# Altium PCB WifiCarPcbDoc.PcbDoc
Units mil, origin at the board's own origin, x right, y up, seen from the top; angles counter-clockwise.
Board outline 3635 x 1570 mil, 2 copper layers (Top Layer, Bottom Layer); 15 components, 34 nets, 94 pads, 0 vias.
Unrouted connection lines stored in the file: 1.
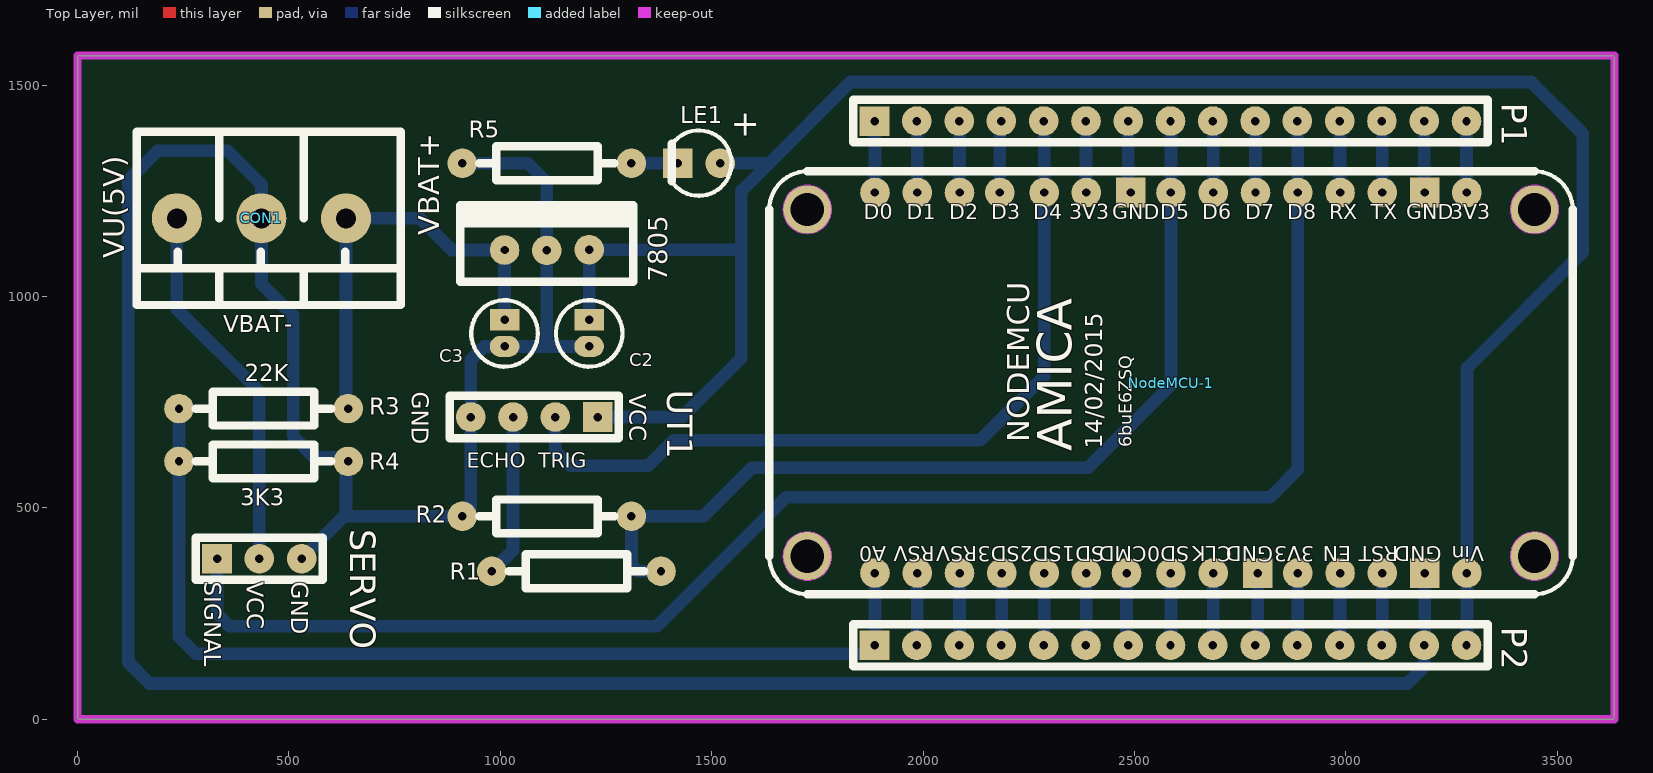
[diagram p0: Top Layer view]
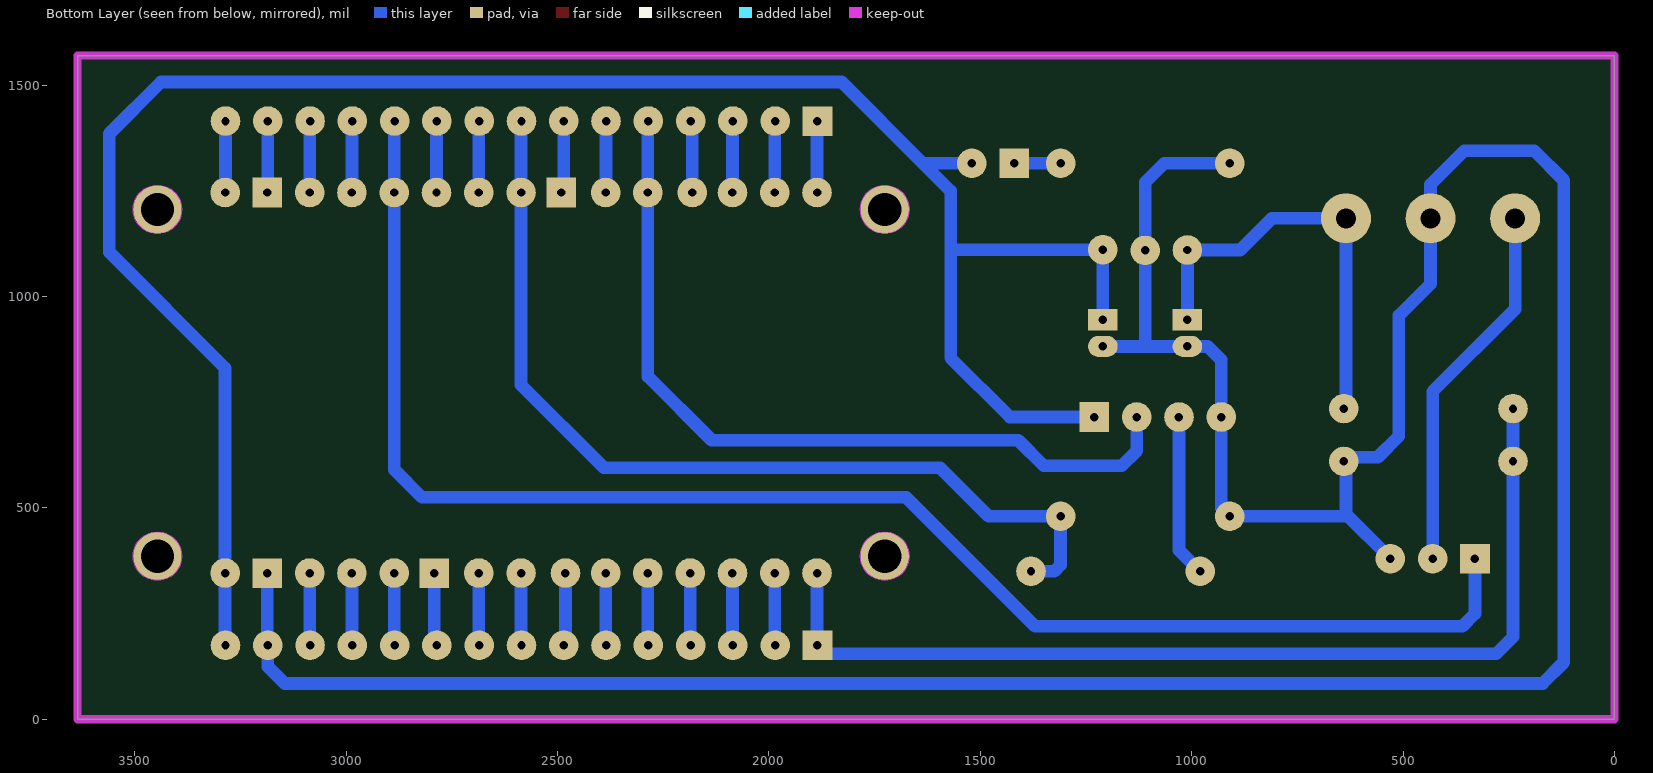
[diagram p1: Bottom Layer view, seen from below]

## Layer stack, top to bottom
Top Solder: solder mask 0.4, Solder Resist, Dk 3.5
Top Layer: signal copper 1.4
Dielectric 1: dielectric 12.6, FR-4, Dk 4.8
Bottom Layer: signal copper 1.4
Bottom Solder: solder mask 0.4, Solder Resist, Dk 3.5

## Board outline
0,0 3635,0 3635,1570 0,1570

## Design rules (kind name [scope] priority, off if disabled: settings)
Clearance [All] p1: gap=10
PolygonConnect [All] p1: connectstyle=Relief reliefconductorwidth=10 reliefentries=4 polygonreliefangle="90 Angle" airgapwidth=10
RoutingVias [All] p1: holewidth=28 width=50 viastyle="Through Hole" minholewidth=28 minwidth=50 maxholewidth=28 maxwidth=50
SolderMaskExpansion [All] p1: expansion=4
Width [All] p1: maxlimit=50 minlimit=10 preferedwidth=30 toplayer_maxwidth=10 toplayer_prefwidth=10 bottomlayer_minwidth=20 minimp=50.000000 maximp=50.000000 favimp=50.000000
30 further rules are at their usual default settings.

## Components (designator, comment, footprint, x,y, rotation, side; value= is the part's Value field where it differs from the comment)
7805 "LM7805" TO-220 1010,1110 r0 top (schematic designator REG1)
C2 "Capacitor Eletrolitico" "CAPACITOR ELETROLITICO 4x5x1.6mm" 1210,945 r90 top
C3 "Capacitor Eletrolitico" "CAPACITOR ELETROLITICO 4x5x1.6mm" 1010,945 r90 top
CON1 "KRE3vias" KRE3-3vias 435,1185 r0 top
LE1 "LED PTH" "LED PTH 3mm VERDE" 1470,1315 r180 top
NodeMCU-1 "NodeMCU V1.0 ESP-12E" "NodeMCU V1.0 ESP-12E" 1640,295 r90 top
P1 "Header 15" HDR1X15 1885,1415 r0 top
P2 "Header 15" HDR1X15 1885,175 r0 top
R1 "Res2" AXIAL-0.4#1 1180,350 r180 top
R2 "Res2" AXIAL-0.4#1 1110,480 r0 top
R3 "22K" AXIAL-0.4#1 440,735 r180 top
R4 "3K3" AXIAL-0.4#2 440,610 r0 top
R5 "Res2" AXIAL-0.4#1 1110,1315 r0 top
SERVO "Micro 9g" SERVO 380,275 r0 top
UT1 "Ultrasonic Sensor" HC-SR04 1055,660 r0 top

## Footprints (in the part's own frame and the unit in brackets; to place one, negate y for a bottom-side part, rotate by r counter-clockwise, add the part's x,y. Pads: shape width x height; smd on the part's side, far side on the other; paste and mask are expansions set on the pad)
AXIAL-0.4#1 [mil] "Axial Device, Thru-Hole; 2 Leads; 0.4 in Pin Spacing"
  round 70 hole 20: 1(-200,0) 2(200,0)
  silkscreen extent -160,-40 160,40
AXIAL-0.4#2 [mil] "Axial Device, Thru-Hole; 2 Leads; 0.4 in Pin Spacing"
  round 70 hole 20: 2(200,0) 20(-200,0)
  silkscreen extent -160,-40 160,40
"CAPACITOR ELETROLITICO 4x5x1.6mm" [mil] "Radial Capacitor 4x5x1.5mm"
  rect 50x70 hole 20: 1(0,0)
  oval 50x70 hole 20: 2(-62.99,0)
  silkscreen extent -111,-79 46,79, body extent -110,-79 47,79, height 205
HC-SR04 [mil]
  round 70 hole 20: ECHO(-25,55) GND(-125,55) TRIG(75,55)
  rect 70x70 hole 20: VCC(175,55)
  silkscreen extent -175,5 225,105
HDR1X15 [mil] "Connector; Header; 15 Position"
  rect 70x70 hole 20: 1(0,0)
  round 70 hole 20: 2(100,0) 3(200,0) 4(300,0) 5(400,0) 6(500,0) 7(600,0) 8(700,0) 9(800,0) 10(900,0) 11(1000,0) 12(1100,0) 13(1200,0) 14(1300,0) 15(1400,0)
  silkscreen extent -50,-50 1450,50
KRE3-3vias [mm]
  round 3 hole 1.2: 1(-5.08,0) 2(0,0) 3(5.08,0)
  silkscreen extent -7.49,-5.21 8.38,5.21, body extent -7.54,-5.29 8.3,5.21, height 14.35
"LED PTH 3mm VERDE" [mil] "LED PTH 3mm"
  round 70 hole 20: 1(-50,0)
  rect 70x70 hole 20: 2(50,0)
  silkscreen extent -77,-78 65,77, body extent -66,-65 61,65, height 216
"NodeMCU V1.0 ESP-12E" [mil]
  round 115 hole 78.74 unplated paste-300 mask-300: 0(91,-86) 0(91,-1806) 0(911,-86) 0(911,-1806)
  round 70 hole 20: 3V3(51,-1246) 3V3(951,-746) 3V3(951,-1646) A0(51,-246) CLK(51,-1046) CMD(51,-841) D0(951,-246) D1(951,-346) D2(951,-446) D3(951,-541) D4(951,-646) D5(951,-946) D6(951,-1046) D7(951,-1146) D8(951,-1246) EN(51,-1346) RST(51,-1446) RSV(51,-346) RSV(51,-446) RX(951,-1346) SD0(51,-946) SD1(51,-746) SD2(51,-646) SD3(51,-546) TX(951,-1446) VIN(51,-1646)
  rect 70x70 hole 20: GND(51,-1151) GND(51,-1546) GND(951,-851) GND(951,-1546)
  Keep-Out Layer circle w2: c91,-86 r57.5
  Keep-Out Layer circle w2: c911,-86 r57.5
  Keep-Out Layer circle w2: c91,-1806 r57.5
  Keep-Out Layer circle w2: c911,-1806 r57.5
  silkscreen extent 1,-1896 1001,4
SERVO [mil]
  round 70 hole 20: GND(150,105) VCC(50,105)
  rect 70x70 hole 20: SIGNAL(-50,105)
  silkscreen extent -100,55 200,155
TO-220 [mil]
  round 70 hole 20: 1(0,0) 2(100,-0.98) 3(200,0.98)
  silkscreen extent -105,-75 305,106, body extent -95,-84 295,94, height 741

## Part data
7805: "Regulador de Tensão 5V"
CON1: "Conector 3 vias"
NodeMCU-1: "NodeMCU V1.0 ESP8266 (ESP-12E)"
P1 P2: "Header, 15-Pin"
R1 R2 R5: "Resistor"
R3 R4: library part Res2, "Resistor"
SERVO: library part "MICRO 9G SERVO"
UT1: library part HC-SR04

## Free pads (board coordinates)
  round 70 hole 20: 2(2386,346)

## Nets (pads, with @x,y where several pads share a name; then routed paths per layer and width w, separated by ;. In a path a pad name is that pad's centre, name@x,y a point inside that pad or via, vN(x,y) a via of type N, cw(c..) or ccw(c..) an arc to the next point about the centre after c; other vN are vias at no path point)
3V3_1: NodeMCU-1.3V3@2386,1246 P1.6 | length 168
  Bottom Layer w30: NodeMCU-1.3V3@2385,1247 P1.6
3V3_2: NodeMCU-1.3V3@3286,1246 P1.15 | length 168
  Bottom Layer w30: NodeMCU-1.3V3@3285,1247 P1.15
3V3_3: NodeMCU-1.3V3@2886,346 P2.11 | length 170
  Bottom Layer w30: P2.11@2886,176 NodeMCU-1.3V3@2886,346
A0: NodeMCU-1.A0 P2.1 R3.2 R4.20 | length 2379.9
  Bottom Layer w30: R3.2 240,620 240,195 280,155 1865,155 P2.1 ; P2.1@1886,176 NodeMCU-1.A0
CLK: NodeMCU-1.CLK P2.9 | length 170
  Bottom Layer w30: P2.9@2686,176 NodeMCU-1.CLK
CMD: NodeMCU-1.CMD P2.7 | length 167
  Bottom Layer w30: P2.7@2481,179 NodeMCU-1.CMD
ECHO: NodeMCU-1.D5 P1.8 R1.1 R2.2 | length 2219
  Bottom Layer w30: R1.1 1325,350 1310,365 R2.2 1480,480 1595,595 2390,595 2586,791 NodeMCU-1.D5 P1.8@2586,1414
EN: NodeMCU-1.EN P2.12 | length 170
  Bottom Layer w30: P2.12@2986,176 NodeMCU-1.EN
ENA: NodeMCU-1.D6 P1.9 | length 168
  Bottom Layer w30: NodeMCU-1.D6 P1.9@2686,1414
ENB: NodeMCU-1.D7 P1.10 | length 168
  Bottom Layer w30: NodeMCU-1.D7 P1.10@2786,1414
GND_1: NodeMCU-1.GND@2491,1246 P1.7 | length 163
  Bottom Layer w30: NodeMCU-1.GND@2485,1252 P1.7
GND_2: NodeMCU-1.GND@3186,1246 P1.14 | length 168
  Bottom Layer w30: NodeMCU-1.GND@3185,1247 P1.14
GND_3: NodeMCU-1.GND@2791,346 P2.10 | length 165
  Bottom Layer w30: P2.10@2791,181 NodeMCU-1.GND@2791,346
GND_4: 7805.2 C2.2 C3.2 CON1.2 NodeMCU-1.GND@3186,346 P2.14 R2.1 R4.2 R5.1 SERVO.GND UT1.GND | length 7423.7
  Bottom Layer w30: SERVO.GND 635,485 ; R2.1 640,480 635,485 ; R5.1 1065,1315 1110,1270 7805.2 1110,887.01 ; R2.1@930,500 UT1.GND 930,850 962.01,882.01 C3.2 C2.2 ; P2.14 3185,125 3145,85 170,85 120,135 120,1275 190,1345 355,1345 435,1265 CON1.2 435,1030 510,955 510,670 560,620 640,620 635,615 635,485 ; P2.14@3186,176 NodeMCU-1.GND@3186,346
GND_5: 
IN1: NodeMCU-1.D0 P1.1 | length 168
  Bottom Layer w30: NodeMCU-1.D0 P1.1@1886,1414
IN2: NodeMCU-1.D1 P1.2 | length 168
  Bottom Layer w30: NodeMCU-1.D1 P1.2@1986,1414
IN3: NodeMCU-1.D2 P1.3 | length 168
  Bottom Layer w30: NodeMCU-1.D2 P1.3@2086,1414
IN4: NodeMCU-1.D3 P1.4 | length 165
  Bottom Layer w30: NodeMCU-1.D3 P1.4@2181,1411
NetLE1_2: LE1.2 R5.2 | length 110
  Bottom Layer w30: R5.2 LE1.2
NetR1_2: R1.2 UT1.ECHO | length 385.7
  Bottom Layer w30: R1.2 1030,400 UT1.ECHO
RST: NodeMCU-1.RST P2.13 | length 170
  Bottom Layer w30: P2.13@3086,176 NodeMCU-1.RST
RSV_1: NodeMCU-1.RSV@1986,346 P2.2 | length 170
  Bottom Layer w30: P2.2@1986,176 NodeMCU-1.RSV@1986,346
RSV_2: NodeMCU-1.RSV@2086,346 P2.3 | length 170
  Bottom Layer w30: P2.3@2086,176 NodeMCU-1.RSV@2086,346
RX: NodeMCU-1.RX P1.12 | length 168
  Bottom Layer w30: NodeMCU-1.RX P1.12@2986,1414
SD0: NodeMCU-1.SD0 P2.8 | length 171.4
  Bottom Layer w30: NodeMCU-1.SD0@2585,345 NodeMCU-1.SD0 P2.8@2586,176
SD1: NodeMCU-1.SD1 P2.6 pad.2 | length 170
  Bottom Layer w30: P2.6@2386,176 NodeMCU-1.SD1
SD2: NodeMCU-1.SD2 P2.5 | length 170
  Bottom Layer w30: P2.5@2286,176 NodeMCU-1.SD2
SD3: NodeMCU-1.SD3 P2.4 | length 170
  Bottom Layer w30: P2.4@2186,176 NodeMCU-1.SD3
SERVO: NodeMCU-1.D8 P1.11 SERVO.SIGNAL | length 3676.5
  Bottom Layer w30: SERVO.SIGNAL 330,250 360,220 1370,220 1675,525 2820,525 2886,591 NodeMCU-1.D8 2886,1414 P1.11
TRIG: NodeMCU-1.D4 P1.5 UT1.TRIG | length 1940.9
  Bottom Layer w30: UT1.TRIG 1130,635 1165,600 1350,600 1410,660 2135,660 2286,811 NodeMCU-1.D4 P1.5@2286,1414
TX: NodeMCU-1.TX P1.13 | length 169.4
  Bottom Layer w30: P1.13 3086,1414 NodeMCU-1.TX
VCC: 7805.1 7805.3 C2.1 C3.1 CON1.3 LE1.1 NodeMCU-1.VIN P2.15 R3.1 UT1.VCC | length 5914
  Bottom Layer w30: R3.1@635,740 CON1.3 810,1185 885,1110 7805.1 C3.1 ; C2.1 7805.3 1564.02,1110.98 ; UT1.VCC 1430,715 1570,855 1570,1250 1635,1315 ; LE1.1 1635,1315 ; P2.15@3286,176 NodeMCU-1.VIN 3286,831 3560,1105 3560,1385 3437.5,1507.5 1827.5,1507.5 1635,1315
VU: CON1.1 SERVO.VCC | length 885.8
  Bottom Layer w30: CON1.1 235,970 430,775 SERVO.VCC
pads on no net: NodeMCU-1.0

## Keep-outs
Keep-Out Layer:
  the board outline again, w20

## Silkscreen, mask and mechanical layers (free items; w line width, h text height)
Top Overlay:
  text "+" at 1545,1380 h60
  text "VBAT+" at 855,1145 h50 r90
  text "VU(5V)" at 110,1090 h50 r90
  text "VBAT-" at 345,915 h40
  text "GND" at 790,775 h40 r270
  text "VCC" at 1305,770 h40 r270
  text "ECHO" at 920,595 h35
  text "TRIG" at 1090,595 h35
  text "SIGNAL" at 300,325 h40 r270
  text "VCC" at 400,325 h40 r270
  text "GND" at 505,325 h40 r270

## Text inside footprints (layer, text, board x,y; h text height)
NodeMCU-1: Top Overlay "GND" at 2828,421 h60 r180; Top Overlay "3V3" at 2925,421 h60 r180; Top Overlay "EN" at 3012,421 h60 r180; Top Overlay "RST" at 3124,421 h60 r180; Top Overlay "GND" at 3227,421 h60 r180; Top Overlay "Vin" at 3327,421 h60 r180; Top Overlay "D7" at 2761.23,1171 h60; Top Overlay "D8" at 2861.11,1171 h60; Top Overlay "RX" at 2960.06,1171 h60; Top Overlay "TX" at 3059,1171 h60; Top Overlay "GND" at 3142.2,1171 h60; Top Overlay "3V3" at 3246,1171 h60; Top Overlay "D6" at 2660.12,1171 h60; Top Overlay "CMD" at 2529.14,421 h60 r180; Top Overlay "D0" at 1860,1171 h60; Top Overlay "D1" at 1961.35,1171 h60; Top Overlay "D2" at 2061.58,1171 h60; Top Overlay "D3" at 2161.58,1171 h60; Top Overlay "D4" at 2260,1171 h60; Top Overlay "3V3" at 2345.01,1171 h60; Top Overlay "GND" at 2447,1171 h60; Top Overlay "D5" at 2561,1171 h60; Top Overlay "A0" at 1913,421 h60 r180; Top Overlay "RSV" at 2027,421 h60 r180; Top Overlay "RSV" at 2127.43,421 h60 r180; Top Overlay "SD3" at 2227.86,421 h60 r180; Top Overlay "SD2" at 2328.29,421 h60 r180; Top Overlay "SD1" at 2428.71,421 h60 r180; Top Overlay "SD0" at 2629.57,421 h60 r180; Top Overlay "CLK" at 2730,421 h60 r180; Top Overlay "6buE6ZSQ" at 2493,644 h30 r90; Top Overlay "NODEMCU" at 2269,655 h90 r90; Top Overlay "AMICA" at 2379,634 h140 r90; Top Overlay "14/02/2015" at 2438,640 h69 r90